# EAGLE board schematic (EAGLE 6.5.0)
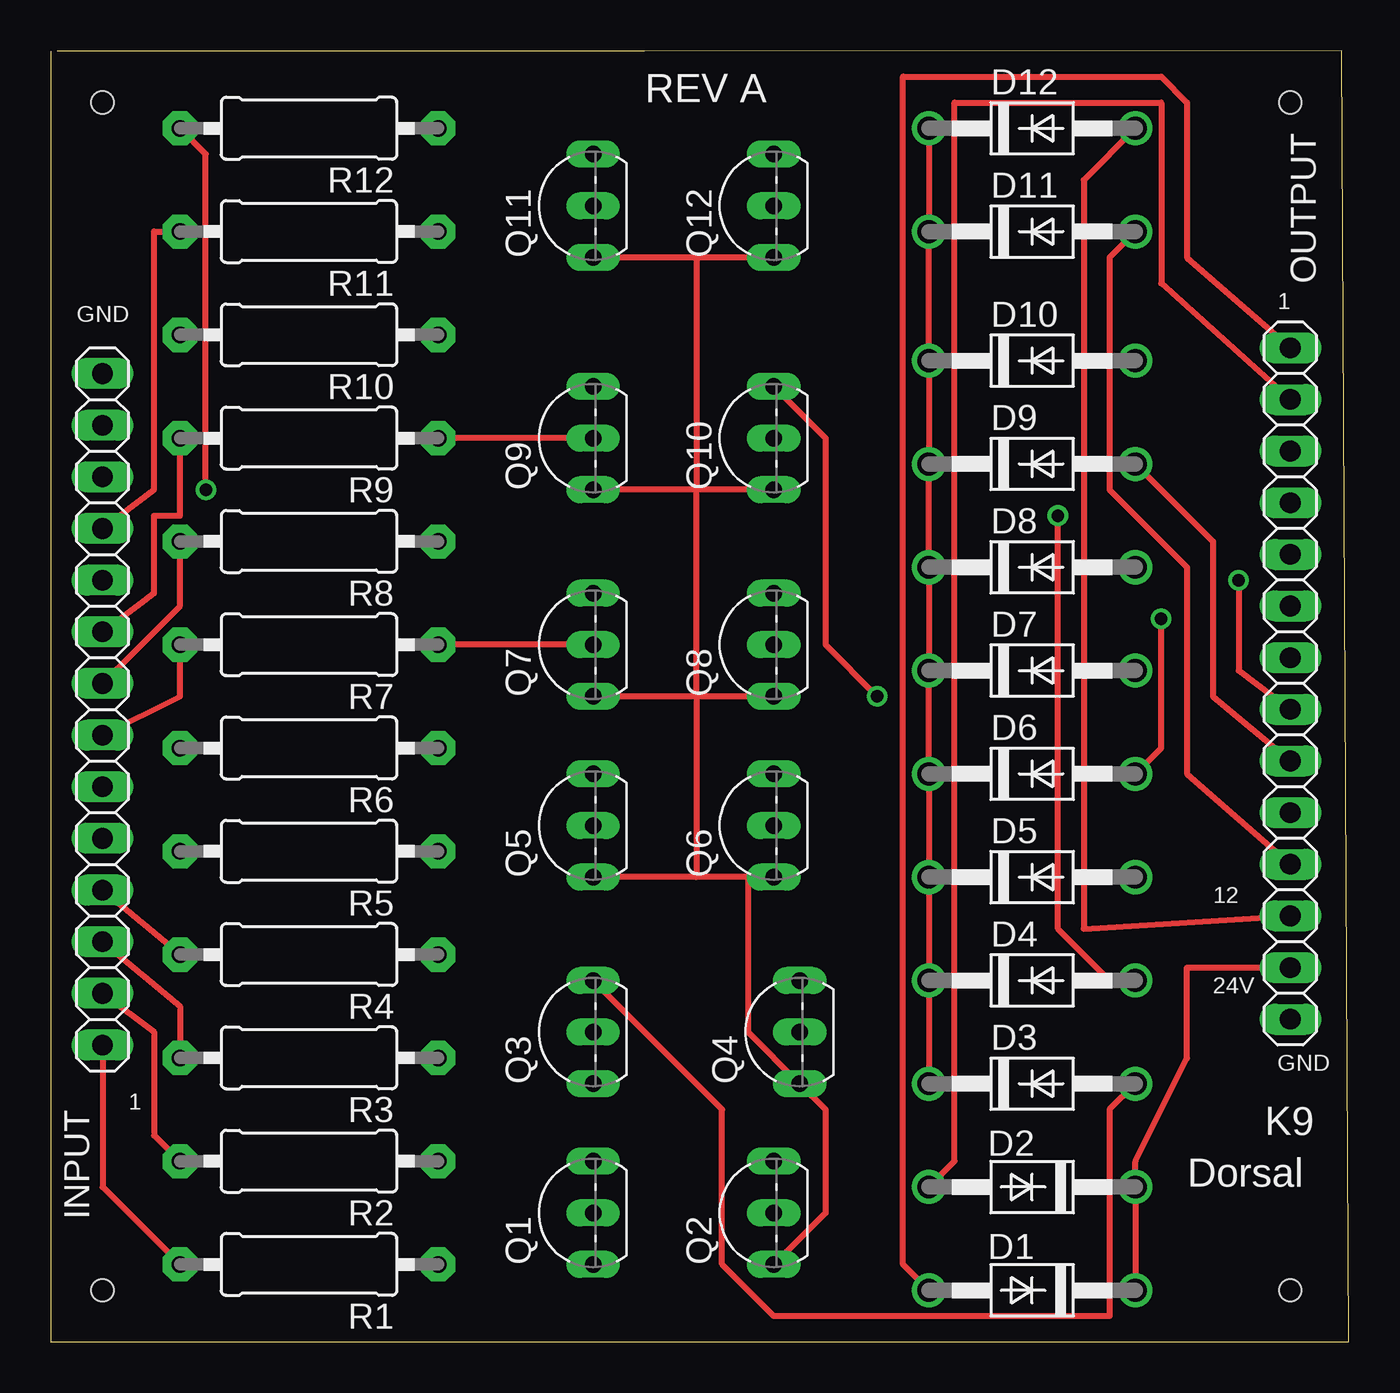
[diagram p0: board, top side]
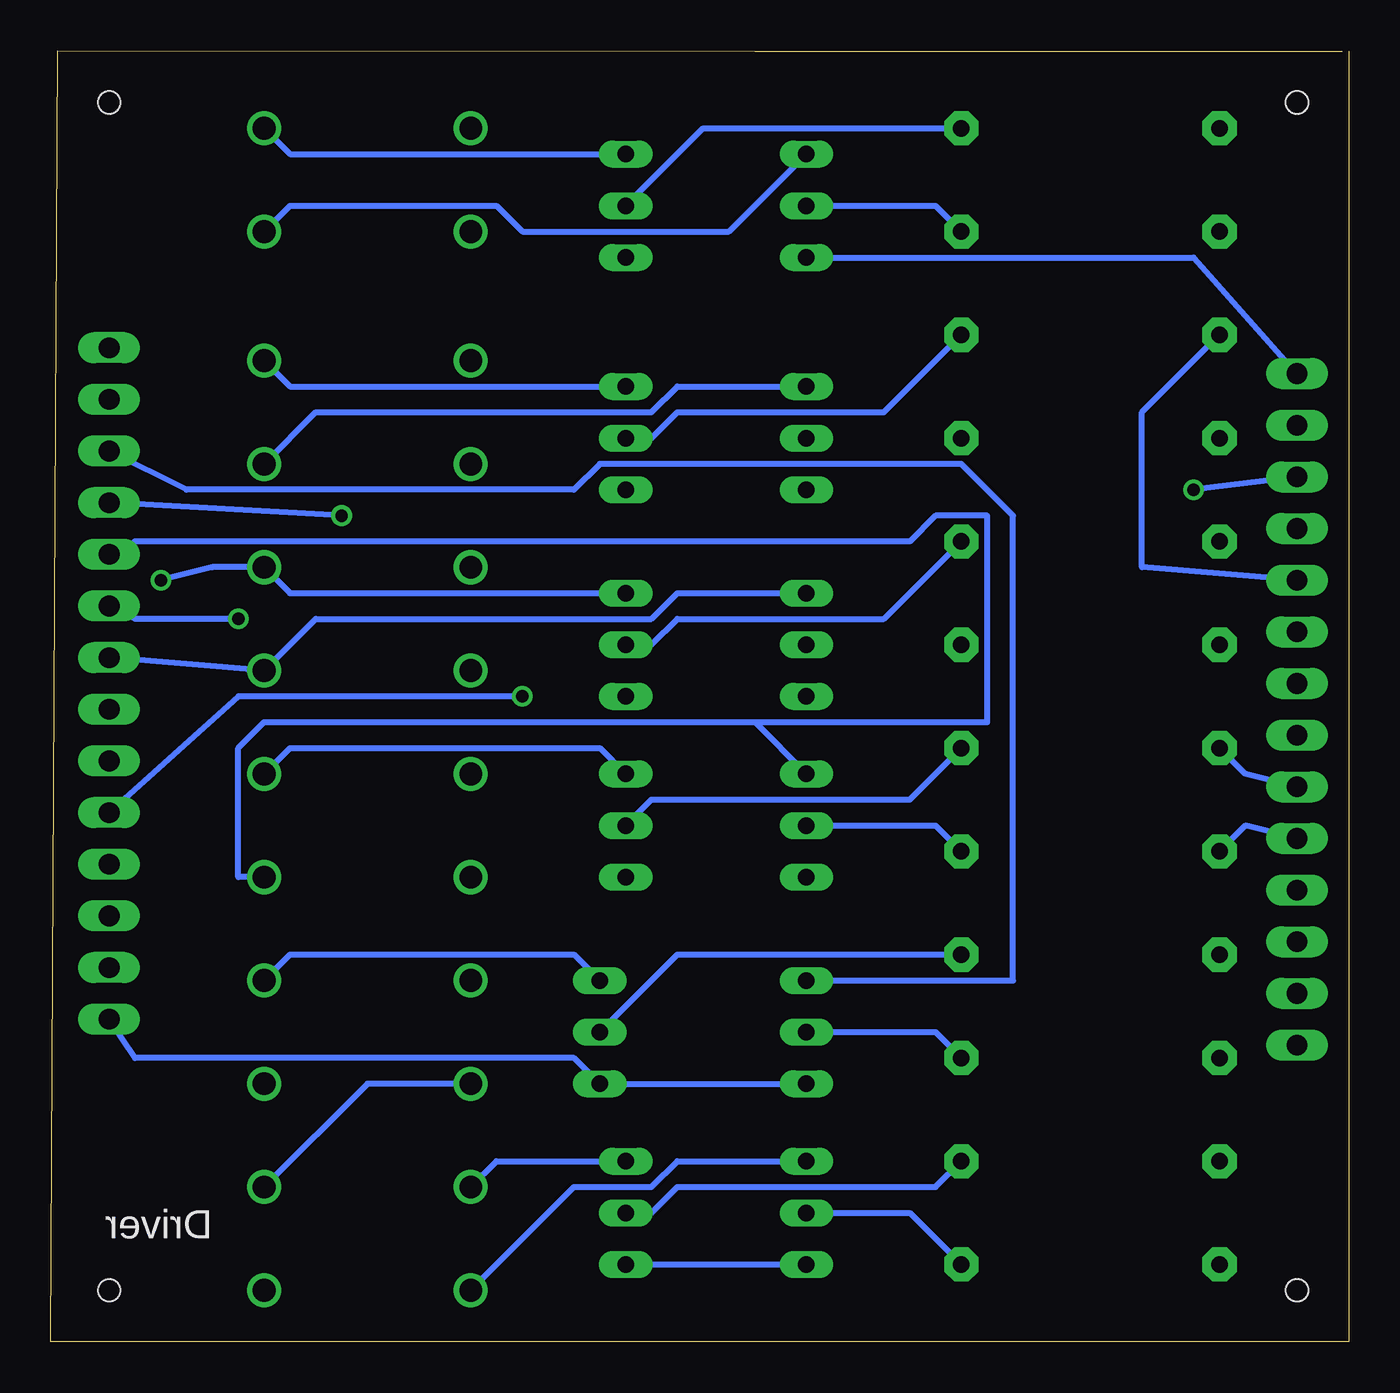
[diagram p1: board, bottom side, seen from below]

Size 63.83 x 63.5 mm. Coordinates in mm from the lower left corner, seen from the top.
Outline: 0.3,63.49 29.21,63.49 63.5,63.5 63.83,0 0,0 0,63.49
Copper layers (1*16): Top 0.035mm / dielectric 1.5mm / Bottom 0.035mm
Design rules "default": minimum track width 10mil, minimum drill 24mil, track to track 8mil, track to pad 8mil, pad to pad 8mil, via to via 8mil, smd to smd 8mil, copper to edge 40mil, drill to drill 8mil, minimum pad ring 10mil, minimum via ring 8mil, stop-mask expansion 4mil, vias tented up to drill 0mil, thermal gap 10mil
Net classes: 0 default: width 0.305 mm, drill 0.508 mm, clearance 0.254 mm
Holes 1.1 mm at 2.54,60.96 60.96,60.96 60.96,2.54 2.54,2.54

## Footprints (pad centres in the part's own frame; a part is rotated, then mirrored left to right if it is on the bottom)
DO41-10 = drill 1.118: A 5.08,0; C -5.08,0
1X14 = drill 1.016 long: 1 -16.51,0; 2 -13.97,0; 3 -11.43,0; 4 -8.89,0; 5 -6.35,0; 6 -3.81,0; 7 -1.27,0; 8 1.27,0; 9 3.81,0; 10 6.35,0; 11 8.89,0; 12 11.43,0; 13 13.97,0; 14 16.51,0
TO92-EBC-OVAL = drill 0.813 long: B 0,-1.27; C 2.54,-1.27; E -2.54,-1.27
0309/12 = drill 0.813 pad 1.676 octagon: 1 -6.35,0; 2 6.35,0

## Placement (x,y rotation side)
D1  1N4004  [DO41-10]  48.26,2.54 180 top
D2  1N4004  [DO41-10]  48.26,7.62 180 top
D3  1N4004  [DO41-10]  48.26,12.7 0 top
D4  1N4004  [DO41-10]  48.26,17.78 0 top
D5  1N4004  [DO41-10]  48.26,22.86 0 top
D6  1N4004  [DO41-10]  48.26,27.94 0 top
D7  1N4004  [DO41-10]  48.26,33.02 0 top
D8  1N4004  [DO41-10]  48.26,38.1 0 top
D9  1N4004  [DO41-10]  48.26,43.18 0 top
D10  1N4004  [DO41-10]  48.26,48.26 0 top
D11  1N4004  [DO41-10]  48.26,54.61 0 top
D12  1N4004  [DO41-10]  48.26,59.69 0 top
INPUT  [1X14]  2.54,31.11 90 top
OUTPUT  [1X14]  60.96,32.38 270 top
Q1  2N2222  [TO92-EBC-OVAL]  25.4,6.35 90 top
Q2  2N2222  [TO92-EBC-OVAL]  34.29,6.35 90 top
Q3  2N2222  [TO92-EBC-OVAL]  25.4,15.24 90 top
Q4  2N2222  [TO92-EBC-OVAL]  35.56,15.24 90 top
Q5  2N2222  [TO92-EBC-OVAL]  25.4,25.4 90 top
Q6  2N2222  [TO92-EBC-OVAL]  34.29,25.4 90 top
Q7  2N2222  [TO92-EBC-OVAL]  25.4,34.29 90 top
Q8  2N2222  [TO92-EBC-OVAL]  34.29,34.29 90 top
Q9  2N2222  [TO92-EBC-OVAL]  25.4,44.45 90 top
Q10  2N2222  [TO92-EBC-OVAL]  34.29,44.45 90 top
Q11  2N2222  [TO92-EBC-OVAL]  25.4,55.88 90 top
Q12  2N2222  [TO92-EBC-OVAL]  34.29,55.88 90 top
R1  [0309/12]  12.7,3.81 180 top
R2  [0309/12]  12.7,8.89 180 top
R3  [0309/12]  12.7,13.97 180 top
R4  [0309/12]  12.7,19.05 180 top
R5  [0309/12]  12.7,24.13 180 top
R6  [0309/12]  12.7,29.21 180 top
R7  [0309/12]  12.7,34.29 180 top
R8  [0309/12]  12.7,39.37 180 top
R9  [0309/12]  12.7,44.45 180 top
R10  [0309/12]  12.7,49.53 180 top
R11  [0309/12]  12.7,54.61 180 top
R12  [0309/12]  12.7,59.69 180 top

## Library data of the parts
D1-D12 = _mod_diode 2; MPN: 1N4004; OC_NEWARK: 67R2154
INPUT OUTPUT R1-R12 = adafruit; OC_NEWARK: unknown
Q1-Q12 = adafruit; MF: FAIRCHILD SEMICONDUCTOR; MPN: PN2222ATF; OC_NEWARK: 58K2048

## Nets
+24V: D1.C D2.C D3.C D4.C D5.C D6.C D7.C D8.C D9.C D10.C D11.C D12.C OUTPUT.13
GND: INPUT.14 OUTPUT.14 Q1.E Q2.E Q3.E Q4.E Q5.E Q6.E Q7.E Q8.E Q9.E Q10.E Q11.E Q12.E
N$1: D1.A OUTPUT.1 Q1.C
N$2: Q1.B R1.1
N$3: INPUT.1 R1.2
N$4: D2.A OUTPUT.2 Q2.C
N$5: Q2.B R2.1
N$6: INPUT.2 R2.2
N$7: D3.A OUTPUT.3 Q3.C
N$8: Q3.B R3.1
N$9: INPUT.3 R3.2
N$10: D4.A OUTPUT.4 Q4.C
N$11: Q4.B R4.1
N$12: INPUT.4 R4.2
N$13: D5.A OUTPUT.5 Q5.C
N$14: Q5.B R5.1
N$15: INPUT.5 R5.2
N$16: D6.A OUTPUT.6 Q6.C
N$17: Q6.B R6.1
N$18: INPUT.6 R6.2
N$19: D7.A OUTPUT.7 Q7.C
N$20: Q7.B R7.1
N$21: INPUT.7 R7.2
N$22: D8.A OUTPUT.8 Q8.C
N$23: Q8.B R8.1
N$24: INPUT.8 R8.2
N$31: D9.A OUTPUT.9 Q9.C
N$32: Q9.B R9.1
N$33: INPUT.9 R9.2
N$34: D10.A OUTPUT.10 Q10.C
N$35: Q10.B R10.1
N$36: INPUT.10 R10.2
N$37: D11.A OUTPUT.11 Q11.C
N$38: Q11.B R11.1
N$39: INPUT.11 R11.2
N$40: D12.A OUTPUT.12 Q12.C
N$41: Q12.B R12.1
N$42: INPUT.12 R12.2

## Tracks (layer width: path | path; a pad name or v marks a point on that pad's centre or on a via)
+24V
  Top 0.305: OUTPUT.13 55.88,18.41 55.88,13.97 53.34,8.89 D2.C D1.C | D12.C D11.C D10.C D9.C D8.C D7.C D6.C D5.C D4.C D3.C
  Bottom 0.305: D2.C 48.26,12.7 D3.C
GND
  Top 0.305: Q2.E 38.1,6.35 38.1,11.43 Q4.E 34.29,15.24 34.29,22.86 | Q10.E 31.75,41.91 | 31.75,41.91 Q9.E | 34.29,22.86 31.75,22.86 | 31.75,22.86 Q5.E | Q8.E 31.75,31.75 | 31.75,31.75 Q7.E | 31.75,31.75 31.75,22.86 | 31.75,31.75 31.75,41.91 | Q12.E 31.75,53.34 | 31.75,53.34 Q11.E | 31.75,53.34 31.75,41.91 | 34.29,22.86 Q6.E
  Bottom 0.305: Q2.E Q1.E | Q3.E Q4.E 38.1,13.97 59.69,13.97 OUTPUT.14 | INPUT.14 7.62,53.34 Q11.E
N$1
  Top 0.305: OUTPUT.1 55.88,53.34 55.88,60.96 54.61,62.23 41.91,62.23 41.91,3.81 D1.A
  Bottom 0.305: Q1.C 33.02,8.89 34.29,7.62 38.1,7.62 D1.A
N$2
  Bottom 0.305: R1.1 21.59,6.35 Q1.B
N$3
  Top 0.305: R1.2 2.54,7.62 INPUT.1
N$4
  Top 0.305: OUTPUT.2 54.61,52.07 54.61,60.96 44.45,60.96 44.45,8.89 D2.A
  Bottom 0.305: Q2.C 41.91,8.89 D2.A
N$5
  Bottom 0.305: R2.1 20.32,7.62 33.02,7.62 34.29,6.35 Q2.B
N$6
  Top 0.305: R2.2 5.08,10.16 5.08,15.24 INPUT.2
N$7
  Top 0.305: Q3.C 33.02,11.43 33.02,3.81 35.56,1.27 52.07,1.27 52.07,11.43 D3.A
  Bottom 0.305: OUTPUT.3 57.15,41.91 38.1,41.91 36.83,43.18 19.05,43.18 16.51,40.64 16.51,17.78 Q3.C
N$8
  Bottom 0.305: R3.1 20.32,15.24 Q3.B
N$9
  Top 0.305: R3.2 6.35,16.51 INPUT.3
N$10  (via drill 0.61)
  Top 0.305: v49.53,40.64 49.53,20.32 52.07,17.78 D4.A
  Bottom 0.305: Q4.C 38.1,19.05 52.07,19.05 D4.A | v49.53,40.64 OUTPUT.4
N$11
  Bottom 0.305: R4.1 33.02,19.05 Q4.B
N$12
  Top 0.305: INPUT.4 R4.2
N$13
  Bottom 0.305: 29.21,30.48 Q5.C | 29.21,30.48 53.34,30.48 54.61,29.21 54.61,22.86 D5.A | OUTPUT.5 59.69,39.37 21.59,39.37 20.32,40.64 17.78,40.64 17.78,30.48 29.21,30.48
N$14
  Bottom 0.305: R5.1 20.32,25.4 Q5.B
N$15
  Bottom 0.305: R5.2 5.08,25.4 INPUT.5
N$16  (via drill 0.61)
  Top 0.305: v54.61,35.56 54.61,29.21 D6.A
  Bottom 0.305: Q6.C 36.83,29.21 52.07,29.21 D6.A | OUTPUT.6 59.69,35.56 v54.61,35.56
N$17
  Bottom 0.305: R6.1 21.59,26.67 34.29,26.67 Q6.B
N$18
  Bottom 0.305: R6.2 5.08,27.94 INPUT.6
N$19
  Bottom 0.305: Q7.C 33.02,36.83 34.29,35.56 50.8,35.56 D7.A OUTPUT.7
N$20
  Top 0.305: Q7.B R7.1
N$21
  Top 0.305: INPUT.7 6.35,31.75 R7.2
N$22  (via drill 0.61)
  Top 0.305: OUTPUT.8 58.42,33.02 v58.42,37.47
  Bottom 0.305: Q8.C 52.07,36.83 D8.A 55.88,38.1 v58.42,37.47
N$23
  Bottom 0.305: R8.1 22.86,35.56 33.02,35.56 34.29,34.29 Q8.B
N$24
  Top 0.305: R8.2 6.35,36.2 INPUT.8
N$31
  Top 0.305: OUTPUT.9 57.15,31.75 57.15,39.37 D9.A
  Bottom 0.305: Q9.C 33.02,46.99 34.29,45.72 50.8,45.72 D9.A
N$32
  Top 0.305: Q9.B R9.1
N$33
  Top 0.305: R9.2 6.35,40.64 5.08,40.64 5.08,36.83 INPUT.9
N$34  (via drill 0.61)
  Top 0.305: v40.64,31.75 38.1,34.29 38.1,44.45 Q10.C
  Bottom 0.305: Q10.C 52.07,46.99 D10.A | OUTPUT.10 54.61,31.75 v40.64,31.75
N$35
  Bottom 0.305: R10.1 22.86,45.72 33.02,45.72 34.29,44.45 Q10.B
N$36
  Bottom 0.305: R10.2 10.16,45.72 10.16,38.1 INPUT.10
N$37
  Top 0.305: OUTPUT.11 55.88,27.94 55.88,38.1 52.07,41.91 52.07,53.34 D11.A
  Bottom 0.305: Q11.C 30.48,54.61 40.64,54.61 41.91,55.88 52.07,55.88 D11.A
N$38
  Bottom 0.305: R11.1 20.32,55.88 Q11.B
N$39
  Top 0.305: R11.2 5.08,54.61 5.08,41.91 INPUT.11
N$40
  Top 0.305: OUTPUT.12 50.8,20.32 50.8,57.15 D12.A
  Bottom 0.305: Q12.C 52.07,58.42 D12.A
N$41
  Bottom 0.305: R12.1 31.75,59.69 Q12.B
N$42  (via drill 0.61)
  Top 0.305: R12.2 7.62,58.42 v7.62,41.91
  Bottom 0.305: INPUT.12 v7.62,41.91

## Text on the board
tNames: REV A | 1 | GND | 12 | 24V | GND | 1 | K9 | Dorsal
bNames: Driver